# Altium PCB HM-WF7201 foot.PcbDoc
Units mil, origin at the board's own origin, x right, y up, seen from the top; angles counter-clockwise.
Board outline 623.5 x 799.18 mil, 4 copper layers (Top, Inner Layer 2, Inner Layer 3, Bottom), stack 35.4 mil thick; 21 components, 0 nets, 21 pads, 0 vias.
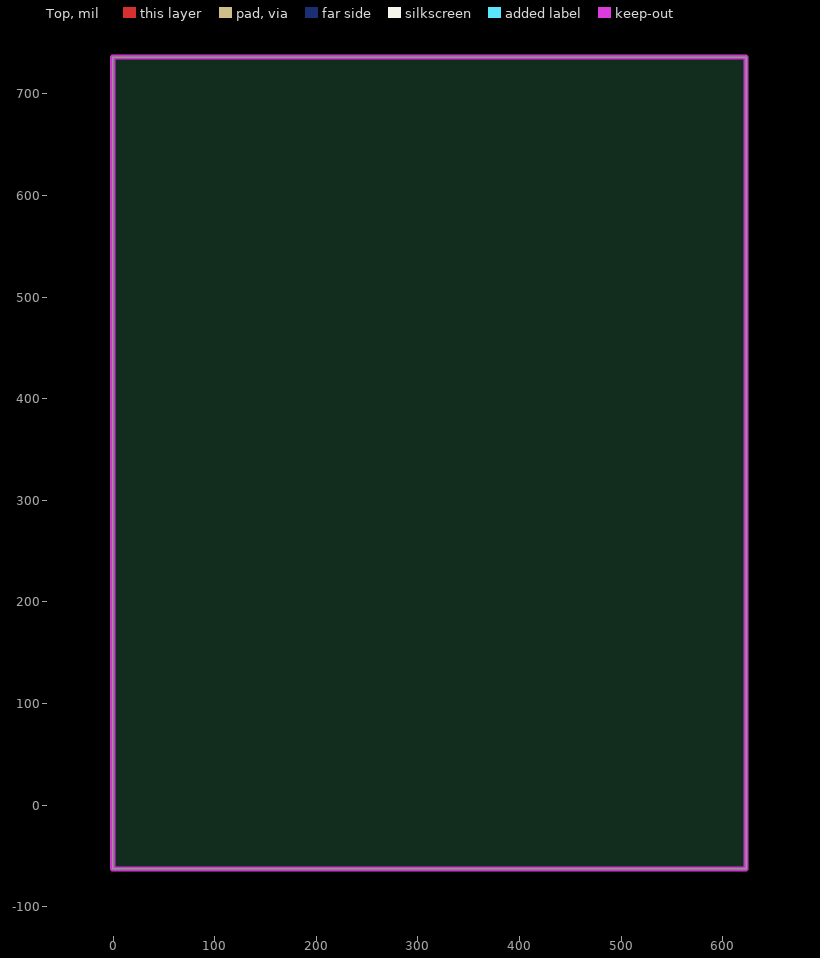
[diagram p0: Top view]
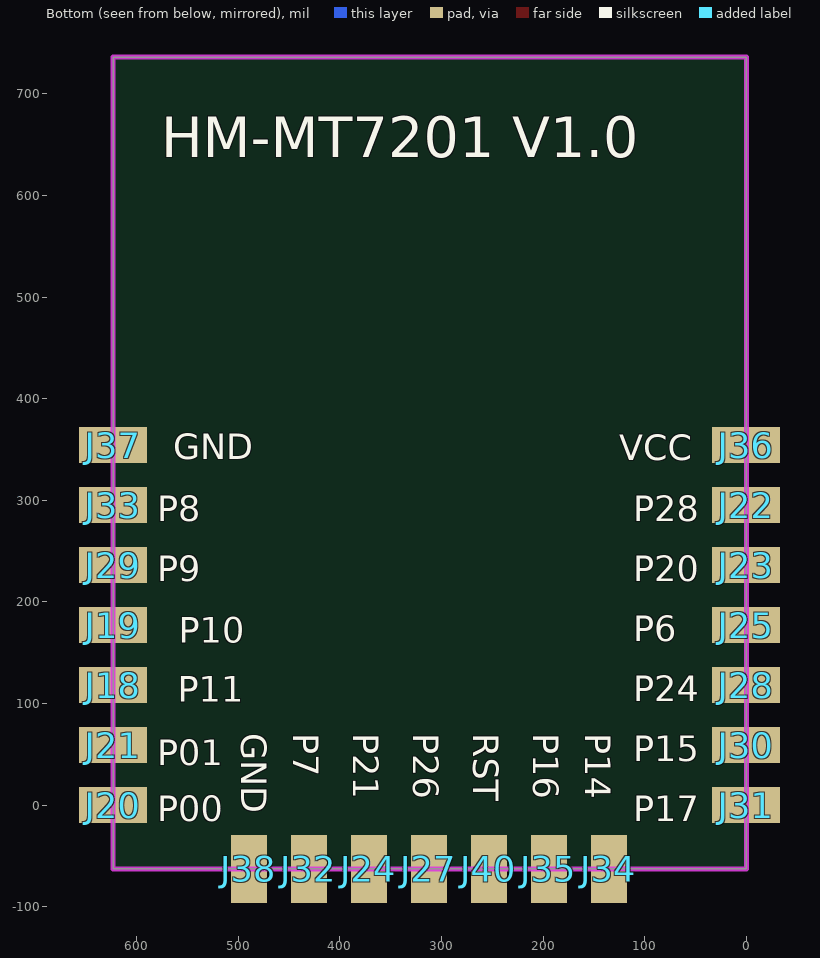
[diagram p1: Bottom view, seen from below]

## Layer stack, top to bottom
Solder Mask Top: solder mask 0.4, Solder Resist, Dk 3.5
Top: signal copper 1.35
Dielectric 1: dielectric 10, FR-4, Dk 4.3
Inner Layer 2: signal copper 1.35
Dielectric2: dielectric 10, FR-4, Dk 4.3
Inner Layer 3: signal copper 1.35
Dielectric3: dielectric 10, FR-4, Dk 4.3
Bottom: signal copper 1.35
Solder Mask Bottom: solder mask 0.4, Solder Resist, Dk 3.5

## Board outline
-0.27,736.22 623.23,736.22 623.23,-62.96 -0.27,-62.96

## Design rules (kind name [scope] priority, off if disabled: settings)
Clearance "Clearance - Default - DEFAULT- SMD" [IsVia vs IsSMTPin] p1: gap=6 ignorepadtopadclearanceinfootprint=FALSE
Clearance "Clearance - Default - DEFAULT - Via" [IsVia vs IsVia] p2: gap=6 ignorepadtopadclearanceinfootprint=FALSE
Clearance "Clearance - Default - DEFAULT - Net" [All] p3: gap=6 ignorepadtopadclearanceinfootprint=FALSE except(8: Arc-Fill Arc-Poly Arc-Region Track-Fill Track-Poly Track-Region SMDPad-Fill SMDPad-Poly SMDPad-Region THPad-Fill THPad-Poly THPad-Region Via-Fill Via-Poly Via-Region; 10: Arc-Hole Track-Hole SMDPad-Hole THPad-Hole Via-Hole Fill-Fill Fill-Poly Fill-Region Fill-Hole Poly-Poly Poly-Region Poly-Hole Region-Region Region-Hole Text-Text Text-Hole)
ComponentClearance "ComponentClearance - Default - DEFAULT" [All] p1: gap=6 collisioncheckmode=3 verticalgap=10 showdistances=FALSE
HoleToHoleClearance "HoleToHoleClearance - Default - DEFAULT" [All] p1: gap=6 allowstackedmicrovias=TRUE
Length "Default Length" [All] p1: maxlimit=50000 minlimit=0
MaxMinImpedance "Default Impedance" [All] p1: minimum=50.00 maximum=150.0
ParallelSegment "Default Parallel Segment Same Layer" [All] p1: limit=1000 gap=200
ParallelSegment "Default Parallel Segment Adjasent" [All] p2: limit=1000 gap=200
PlaneConnect "Default PlaneConnect" [All] p1: planeconnectstyle=Direct reliefexpansion=20 reliefentries=4 reliefconductorwidth=15 reliefairgap=10
PolygonConnect "PolygonConnect - Default SMT" [IsSMTPin] p1: connectstyle=Direct reliefconductorwidth=10 reliefentries=4 polygonreliefangle="45 Angle" airgapwidth=10
PolygonConnect "PolygonConnect - Default Pad" [All] p2: connectstyle=Direct reliefconductorwidth=15 reliefentries=4 polygonreliefangle="45 Angle" airgapwidth=10
RoutingLayers "RoutingLayers - Default - DEFAULT" [All] p1: top layer_v5=TRUE mid layer 1_v5=TRUE mid layer 2_v5=TRUE bottom layer_v5=TRUE
RoutingPriority "RoutingPriority - Default - DEFAULT" [All] p1: routingpriority=3
RoutingTopology "Default Routing Topology" [All] p1: topology=Shortest
RoutingVias "RoutingVias - Default - DEFAULT" [All] p1: holewidth=11.81 width=17.72 viastyle="Through Hole" minholewidth=11.81 minwidth=17.72 maxholewidth=11.81 maxwidth=17.72
SMDToCorner "SMDToCorner - Default - DEFAULT" [All] p1: distance=60000
SolderMaskExpansion "SolderMaskExpansion from CAM settings" [All] p1: expansion=5 istentingtop=FALSE
Width "Default Width" [All] p1: maxlimit=100 minlimit=1 preferedwidth=5
22 further rules are at their usual default settings.

## Components (designator, comment, footprint, x,y, rotation, side; value= is the part's Value field where it differs from the comment)
J18 "SPAD" SPAD 623.23,118.11 r0 top
J19 "SPAD" SPAD 623.23,177.17 r0 top
J20 "SPAD" SPAD 623.23,0 r0 top
J21 "SPAD" SPAD 623.23,59.06 r0 top
J22 "SPAD" SPAD 0,295.28 r0 top
J23 "SPAD" SPAD 0,236.22 r0 top
J24 "SPAD" SPAD 371.38,-62.96 r90 top
J25 "SPAD" SPAD 0,177.17 r0 top
J27 "SPAD" SPAD 312.32,-62.96 r90 top
J28 "SPAD" SPAD 0,118.11 r0 top
J29 "SPAD" SPAD 623.23,236.22 r0 top
J30 "SPAD" SPAD 0,59.06 r0 top
J31 "SPAD" SPAD 0,0 r0 top
J32 "SPAD" SPAD 430.43,-62.96 r90 top
J33 "SPAD" SPAD 623.23,295.28 r0 top
J34 "SPAD" SPAD 135.16,-62.96 r90 top
J35 "SPAD" SPAD 194.21,-62.96 r90 top
J36 "SPAD" SPAD 0,354.33 r0 top
J37 "SPAD" SPAD 623.23,354.33 r0 top
J38 "SPAD" SPAD 489.49,-62.96 r90 top
J40 "SPAD" SPAD 253.27,-62.96 r90 top

## Footprints (in the part's own frame and the unit in brackets; to place one, negate y for a bottom-side part, rotate by r counter-clockwise, add the part's x,y. Pads: shape width x height; smd on the part's side, far side on the other; paste and mask are expansions set on the pad)
SPAD [mm]
  rect 1.7x0.9 smd far side: 1(0,0)

## Nets (pads, with @x,y where several pads share a name; then routed paths per layer and width w, separated by ;. In a path a pad name is that pad's centre, name@x,y a point inside that pad or via, vN(x,y) a via of type N, cw(c..) or ccw(c..) an arc to the next point about the centre after c; other vN are vias at no path point)
pads on no net: J18.1 J19.1 J20.1 J21.1 J22.1 J23.1 J24.1 J25.1 J27.1 J28.1 J29.1 J30.1 J31.1 J32.1 J33.1 J34.1 J35.1 J36.1 J37.1 J38.1 J40.1

## Keep-outs
Keep-Out Layer:
  the board outline again, w5

## Silkscreen, mask and mechanical layers (free items; w line width, h text height)
Silkscreen Bottom:
  text "HM-MT7201 V1.0" at 575.98,637.8 h40
  text "GND" at 563.78,340.16 h25
  text "VCC" at 124.8,339.37 h25
  text "P28" at 111.42,279.53 h25
  text "P8" at 579.92,279.53 h25
  text "P20" at 111.42,220.47 h25
  text "P9" at 579.92,220.47 h25
  text "P6" at 111.42,161.42 h25
  text "P10" at 558.66,159.84 h25
  text "P24" at 111.42,102.36 h25
  text "P11" at 559.45,101.57 h25
  text "P14" at 158.66,70.87 h25 r90
  text "P16" at 209.84,70.87 h25 r90
  text "RST" at 268.9,70.87 h25 r90
  text "P26" at 327.95,70.87 h25 r90
  text "P21" at 387.01,70.87 h25 r90
  text "P7" at 446.06,70.87 h25 r90
  text "GND" at 497.24,70.87 h25 r90
  text "P15" at 111.42,43.31 h25
  text "P01" at 579.92,39.37 h25
  text "P17" at 111.42,-15.75 h25
  text "P00" at 579.92,-15.75 h25
Drill Drawing:
  lines w1: -0.27,736.22 -0.25,736.22 ; 56.42,-62.96 56.44,-62.96 ; 119.29,736.22 119.32,736.22 ; 623.23,736.22 623.25,736.22
  lines w10: -205,-62.96 6.42,-62.96 ; -205,736.22 69.29,736.22 ; -155,285.35 -155,-62.96 ; -155,420.35 -155,736.22 ; -150.27,824.8 -0.27,824.8 ; -0.27,786.22 -0.27,874.8 ; 623.23,786.22 623.23,874.8 ; 773.23,824.8 623.23,824.8 ; -155,-62.96 -130,37.04 -180,37.04 -155,-62.96 ; -155,736.22 -180,636.22 -130,636.22 -155,736.22 ; -0.27,824.8 -100.27,849.8 -100.27,799.8 -0.27,824.8 ; 623.23,824.8 723.23,799.8 723.23,849.8 623.23,824.8
  text "15.8mm" at 803.23,787.3 h50
  text "20.3mm" at -348.03,315.35 h50